# Altium PCB Template_PS_2Layer_PCB.PcbDoc
Units mil, origin at the board's own origin, x right, y up, seen from the top; angles counter-clockwise.
Board outline 3400 x 4300 mil, 2 copper layers (Top Layer, Bottom Layer); 16 components, 2 nets, 88 pads, 4 vias.
Unrouted connection lines stored in the file: 28.
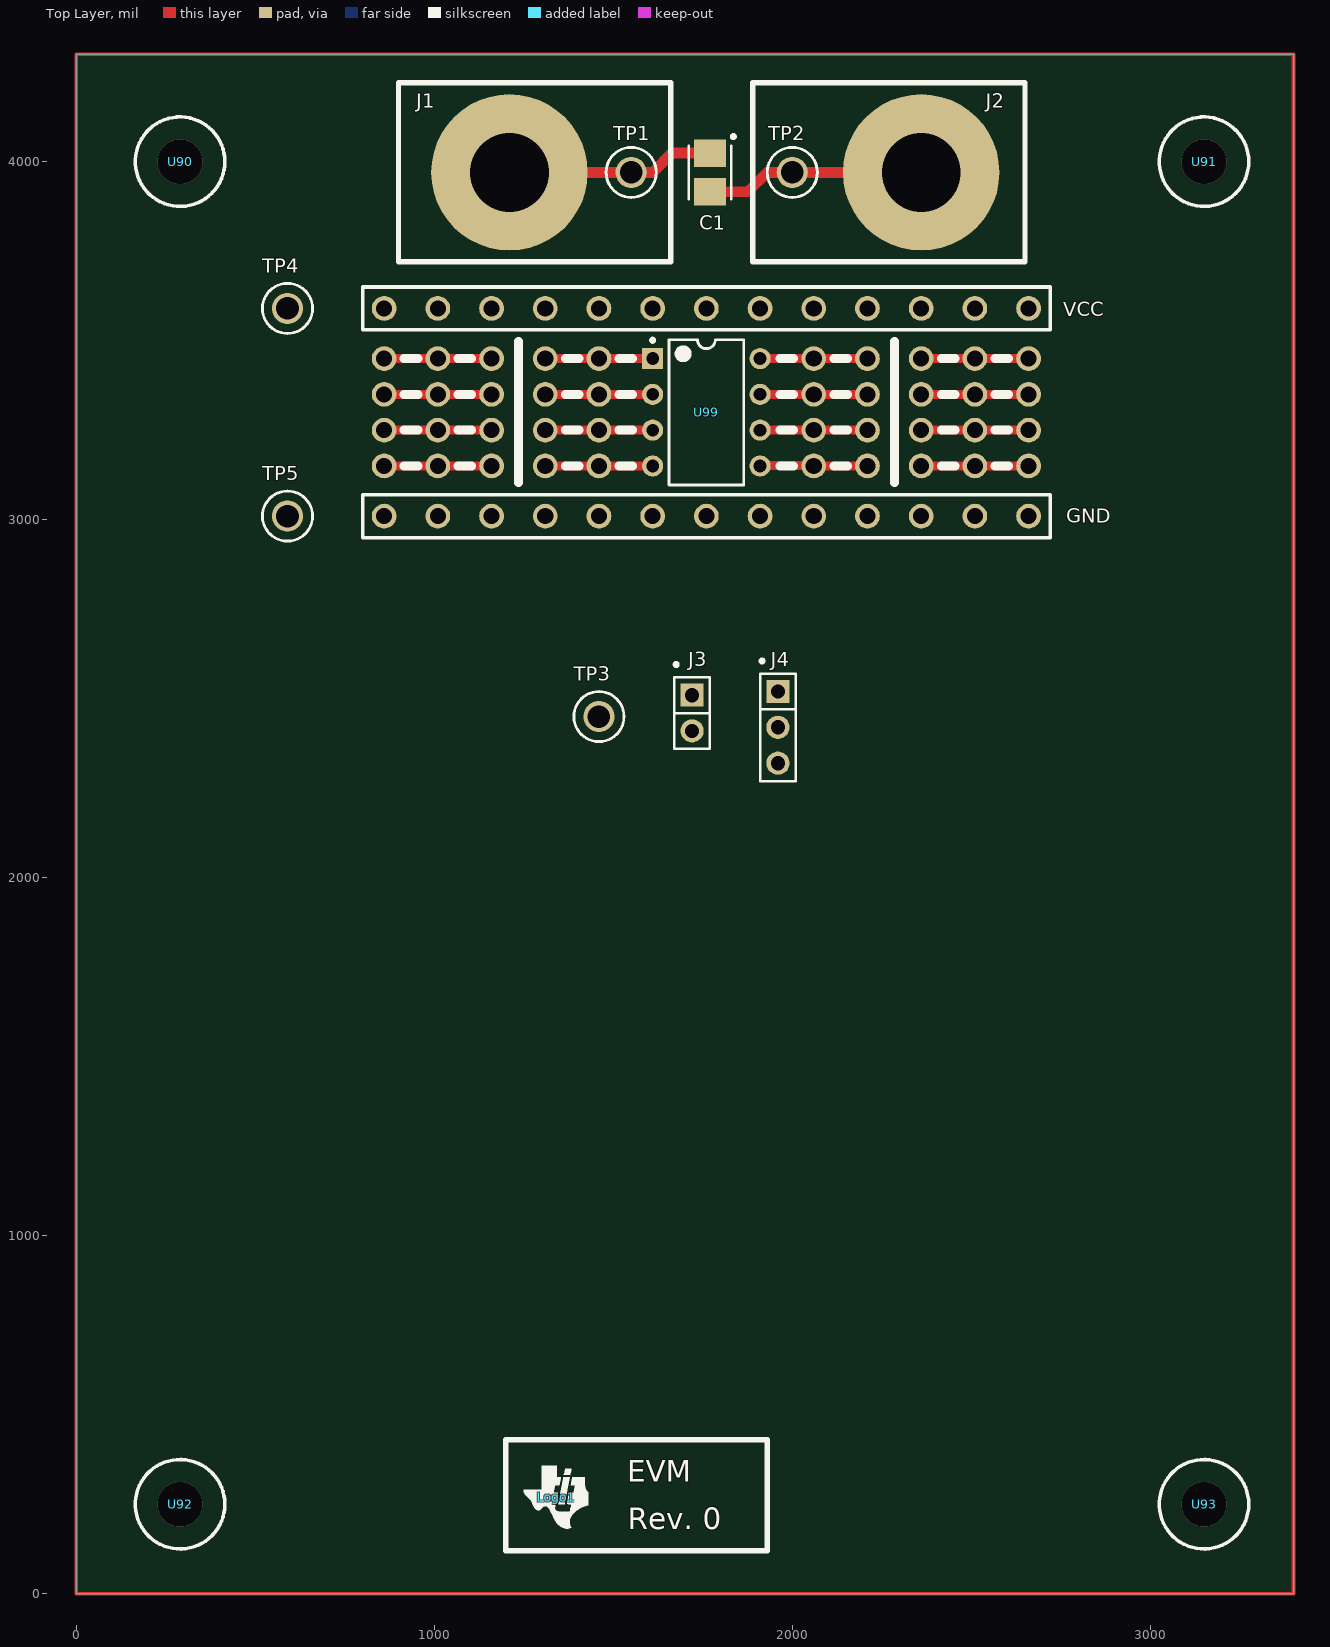
[diagram p0: Top Layer view]
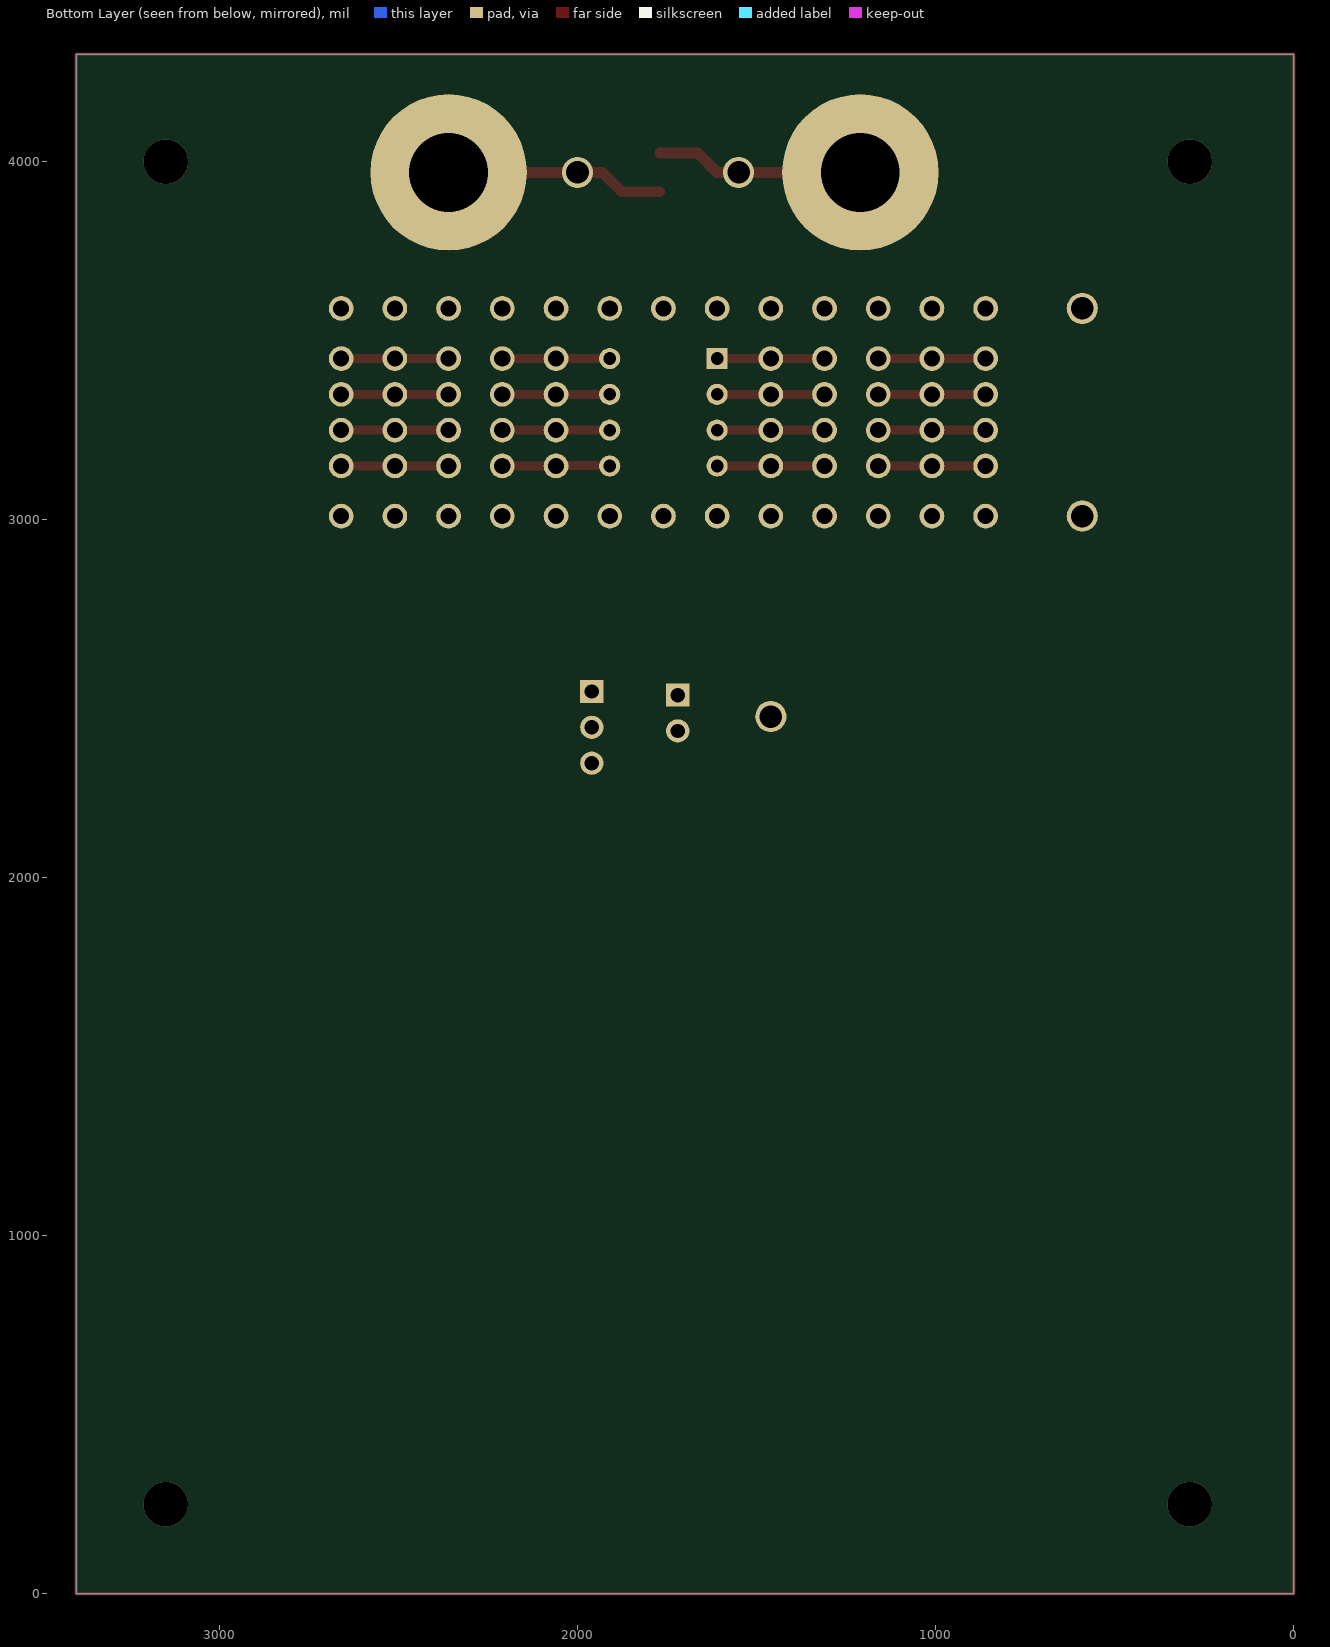
[diagram p1: Bottom Layer view, seen from below]

## Layer stack, top to bottom
Top Layer: signal copper 1.4
Dielectric: core 12.6, FR-4, Dk 4.8
Bottom Layer: signal copper 1.4

## Board outline
0,0 0,4300 3400,4300 3400,0

## Design rules (kind name [scope] priority, off if disabled: settings)
AssemblyTestPointUsage [All] p1 off:
AssemblyTestpoint [All] p1 off: testpointundercomponent=TRUE minsize=40 maxsize=100 preferedsize=60 minholesize=0 maxholesize=40 preferedholesize=32 testpointgrid=1 usegrid=TRUE gridtolerance=0.01 allowsidetop=TRUE allowsidebottom=TRUE
Clearance [All] p1: gap=6
ComponentClearance [All] p1 off: gap=10 collisioncheckmode=3 verticalgap=10 showdistances=FALSE
DiffPairsRouting [All] p1 off: maxlimit=10 minlimit=10 mostfreqgap=10 maxuncoupledlength=500
FabricationTestPointUsage TestPointUsage [All] p1 off: valid=0 allowmultiple=FALSE
FabricationTestpoint Testpoint [All] p1 off: side=3 testpointundercomponent=TRUE minsize=40 maxsize=100 preferedsize=60 minholesize=0 maxholesize=40 preferedholesize=32 testpointgrid=1 allowsidetop=TRUE allowsidebottom=TRUE usegrid=TRUE gridtolerance=0.01
FanoutControl Fanout_BGA [IsBGA] p1 off: bgadir=Out bgaviamode=Centered fanoutstyle=Auto fanoutdirection=Alternating viagrid=1 // Fanout_BGA (Default Rule)
FanoutControl Fanout_LCC [IsLCC] p2 off: bgadir=Out bgaviamode=Centered fanoutstyle=Auto fanoutdirection=Alternating viagrid=1 // Fanout_LCC (Default Rule)
FanoutControl Fanout_SOIC [IsSOIC] p3 off: bgadir=Out bgaviamode=Centered fanoutstyle=Auto fanoutdirection=Alternating viagrid=1 // Fanout_SOIC (Default Rule)
FanoutControl Fanout_Small [(CompPinCount < 5)] p4 off: bgadir=Out bgaviamode=Centered fanoutstyle=Auto fanoutdirection=OutThenIn viagrid=1 // Fanout_Small (Default Rule)
FanoutControl Fanout_Default [All] p5 off: bgadir=Out bgaviamode=Centered fanoutstyle=Auto fanoutdirection=Alternating viagrid=1 // Fanout_Default (Default Rule)
Height [All] p1 off: minheight=0 maxheight=1000 prefheight=500
HoleSize [All] p1: absolutevalues=TRUE maxlimit=400 minlimit=15 maxpercent=80.000 minpercent=20.000
HoleToHoleClearance [All] p1: gap=8 allowstackedmicrovias=TRUE
LayerPairs [All] p1 off: enforce=FALSE
MinimumSolderMaskSliver [All] p1: minsoldermaskwidth=4
PolygonConnect [All] p1: connectstyle=Relief reliefconductorwidth=25 reliefentries=4 polygonreliefangle="90 Angle" airgapwidth=10
RoutingVias [All] p1: holewidth=15 width=25 viastyle="Through Hole" minholewidth=15 minwidth=25 maxholewidth=400 maxwidth=500
SilkToSilkClearance [All] p1: silktosilkclearance=5
SilkscreenOverComponentPads [All] p1: minsilkscreentomaskgap=5
SolderMaskExpansion [All] p1: expansion=2
Width [All] p1: maxlimit=100 minlimit=6 preferedwidth=10
10 further rules are at their usual default settings.

## Components (designator, comment, footprint, x,y, rotation, side; value= is the part's Value field where it differs from the comment)
C1 "TPSB106M020R1000" 3528-21 1770,3970 r270 top
J1 "Banana Jack, Solder" "JACK NON-INSULATED .218\"" 1210,3970 r90 top
J2 "Banana Jack, Solder" "JACK NON-INSULATED .218\"" 2360,3970 r90 top
J3 "961102-6404-AR" "Header 100mil, 1x2" 1720,2460 r270 top
J4 "961103-6404-AR" "CONN HEADER VERT SGL 3POS GOLD" 1960,2420 r270 top
Logo1 "Texas Instruments" TI_Symbol_Overlay_Small 1340,270 r0 top
TP1 "5005" Keystone5005 1550,3970 r90 top
TP2 "5006" Keystone5006 2000,3970 r90 top
TP3 "5009" Keystone5009 1460,2450 r90 top
TP4 "5005" Keystone5005 590,3590 r90 top
TP5 "5006" Keystone5006 590,3010 r90 top
U90 "Standoff" "STANDOFF HEX 4-40THR ALUM 1\"L" 290,4000 r0 top
U91 "Standoff" "STANDOFF HEX 4-40THR ALUM 1\"L" 3150,4000 r0 top
U92 "Standoff" "STANDOFF HEX 4-40THR ALUM 1\"L" 290,250 r0 top
U93 "Standoff" "STANDOFF HEX 4-40THR ALUM 1\"L" 3150,250 r0 top
U99 "ProtoBoard" ProtoArea 860,3010 r0 top

## Footprints (in the part's own frame and the unit in brackets; to place one, negate y for a bottom-side part, rotate by r counter-clockwise, add the part's x,y. Pads: shape width x height; smd on the part's side, far side on the other; paste and mask are expansions set on the pad)
3528-21 [mm] "Medium Density IPC, based on SM-782 section 8.4"
  rect 1.95x2.25 smd: 1(-1.375,0) 2(1.375,0)
  silkscreen extent -2.66,-1.5 1.9,1.79, body extent -1.85,-1.5 1.85,1.5, height 2.1
"CONN HEADER VERT SGL 3POS GOLD" [mm] "CONN HEADER VERT SGL 3POS GOLD"
  rect 1.65x1.65 hole 1.016 mask+0: 1(-2.54,0)
  round 1.65 hole 1.016 mask+0: 2(0,0) 3(2.54,0)
  silkscreen extent -4.83,-1.27 3.81,1.27, body extent -3.81,-1.27 3.81,1.27, height 8.38
"Header 100mil, 1x2" [mm] "Header 100mil, 1x2"
  rect 1.65x1.65 hole 1.016 mask+0: 1(-1.27,0)
  round 1.65 hole 1.016 mask+0: 2(1.27,0)
  silkscreen extent -3.56,-1.27 2.54,1.27, body extent -2.54,-1.27 2.54,1.27, height 8.38
"JACK NON-INSULATED .218\"" [mil] "JACK NON-INSULATED .218\""
  round 437 hole 220: 1(0,0)
Keystone5005 [mil] "Keystone Compact loops"
  round 87 hole 63: 1(0,0)
  silkscreen extent -70,-70 70,70, body extent -63,-63 62,63, height 225
Keystone5006 [mil] "Keystone Compact loops"
  round 87 hole 63: 1(0,0)
  silkscreen extent -70,-70 70,70, body extent -63,-63 62,63, height 225
Keystone5009 [mil] "Keystone Compact loops"
  round 87 hole 63: 1(0,0)
  silkscreen extent -70,-70 70,70, body extent -63,-63 62,63, height 225
ProtoArea [mil] "ProtoArea"
  round 69 hole 45: 0(0,0) 0(150,0) 0(300,0) 0(450,0) 0(600,0) 0(750,0) 0(900,0) 0(1050,0) 0(1200,0) 0(1350,0) 0(1500,0) 0(1650,0) 0(1800,0) 1(450,440) 1(600,440) 2(450,340) 2(600,340) 3(450,240) 3(600,240) 4(450,140) 4(600,140) 5(1200,140) 5(1350,140) 6(1200,240) 6(1350,240) 7(1200,340) 7(1350,340) 8(1200,440) 8(1350,440) 9(0,240) 9(150,240) 9(300,240) 10(0,340) 10(150,340) 10(300,340) 11(0,440) 11(150,440) 11(300,440) 12(0,140) 12(150,140) 12(300,140) 13(1500,140) 13(1650,140) 13(1800,140) 14(1500,240) 14(1650,240) 14(1800,240) 15(1500,340) 15(1650,340) 15(1800,340) 16(1500,440) 16(1650,440) 16(1800,440) 17(0,580) 17(150,580) 17(300,580) 17(450,580) 17(600,580) 17(750,580) 17(900,580) 17(1050,580) 17(1200,580) 17(1350,580) 17(1500,580) 17(1650,580) 17(1800,580)
  rect 59.06x59.06 hole 35.43: 1(750,440)
  round 59.06 hole 35.43: 2(750,340) 3(750,240) 4(750,140) 5(1050,140) 6(1050,240) 7(1050,340) 8(1050,440)
  Top Layer lines w25: 0,140 150,140 300,140 ; 0,240 150,240 300,240 ; 0,340 150,340 300,340 ; 0,440 150,440 300,440 ; 450,140 600,140 750,140 ; 450,240 600,240 750,240 ; 450,340 600,340 750,340 ; 450,440 600,440 750,440 ; 1050,240 1200,240 1350,240 ; 1050,440 1200,440 1350,440 ; 1051,141 1199,141 1200,140 1350,140 ; 1053,340 1200,340 1350,340 ; 1500,140 1650,140 1800,140 ; 1500,240 1650,240 1800,240 ; 1500,340 1650,340 1800,340 ; 1500,440 1650,440 1800,440
  silkscreen extent -60,-60 1860,640, body extent 758,87 1042,493, height 210
"STANDOFF HEX 4-40THR ALUM 1\"L" [mil] "STANDOFF HEX 4-40THR ALUM 1\"L"
  silkscreen extent -125,-125 125,125
TI_Symbol_Overlay_Small [mil]
  silkscreen extent -90,-88 91,88

## Part data
C1: "CAP, TANT, 10uF, 20V, +/-20%, 1 ohm, 3528-21 SMD"
J1 J2: "JACK NON-INSULATED .218\""
J3: library part "CONN HEADER VERT SGL 2POS GOLD", "CONN HEADER VERT SGL 2POS GOLD"
J4: library part "CONN HEADER VERT SGL 3POS GOLD", "CONN HEADER VERT SGL 3POS GOLD"
Logo1: library part TI_Logo, "Texas Instrument Corporate Signature"
TP1 TP4: "Test Point, TH, Compact, Red"
TP2 TP5: "Test Point, TH, Compact, Black"
TP3: "Test Point, TH, Compact, Yellow"
U90 U91 U92 U93: library part "Standoff, 1\", 4-40, Alum, F-F", "STANDOFF HEX 4-40THR ALUM 1\"L"
U99: library part Proto, "Prototype Area"

## Via types
v1: diameter 125, hole 125, Top Layer to Bottom Layer, 4 vias

## Nets (pads, with @x,y where several pads share a name; then routed paths per layer and width w, separated by ;. In a path a pad name is that pad's centre, name@x,y a point inside that pad or via, vN(x,y) a via of type N, cw(c..) or ccw(c..) an arc to the next point about the centre after c; other vN are vias at no path point)
GND: C1.2 J2.1 TP2.1 TP5.1 U99.0 | length 612.4
  Top Layer w30: C1.2 1875.87,3915.87 1930,3970 TP2.1 J2.1
VCC: C1.1 J1.1 TP1.1 TP4.1 U99.17 | length 582.4
  Top Layer w30: J1.1 TP1.1 1610,3970 1664.13,4024.13 C1.1
pads on no net: J3.1 J3.2 J4.1 J4.2 J4.3 TP3.1 U99.1 U99.2 U99.3 U99.4 U99.5 U99.6 U99.7 U99.8 U99.9 U99.10 U99.11 U99.12 U99.13 U99.14 U99.15 U99.16
copper on no net: | length 15400
  Top Layer w10: 0,0 0,4300 3400,4300 3400,0 0,0
  other v1: 290,250 3150,250 290,4000 3150,4000

## Silkscreen, mask and mechanical layers (free items; w line width, h text height)
Top Overlay:
  lines w15: 900,3720 1660,3720 1660,4220 900,4220 900,3720 ; 1200,120 1930,120 1930,430 1200,430 1200,120 ; 1890,3720 1890,4220 2650,4220 2650,3720 1890,3720
  text "EVM" at 1539,313 h60
  text "Rev. 0" at 1540,180 h60

## Text inside footprints (layer, text, board x,y; h text height)
U99: Top Overlay "GND" at 2765,2991 h40; Top Overlay "VCC" at 2757,3568 h40